# EAGLE board SenseBox-Eye_v1.2 (EAGLE 9.6.2)
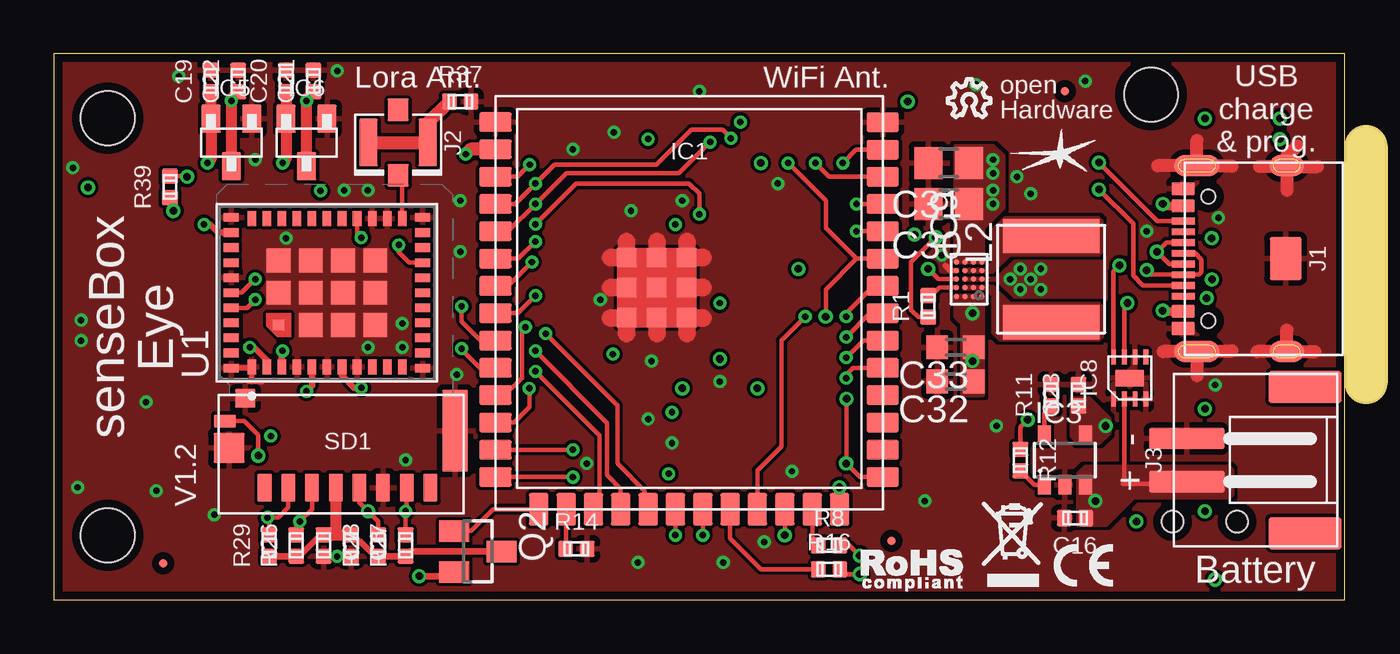
[diagram p0: board, top side]
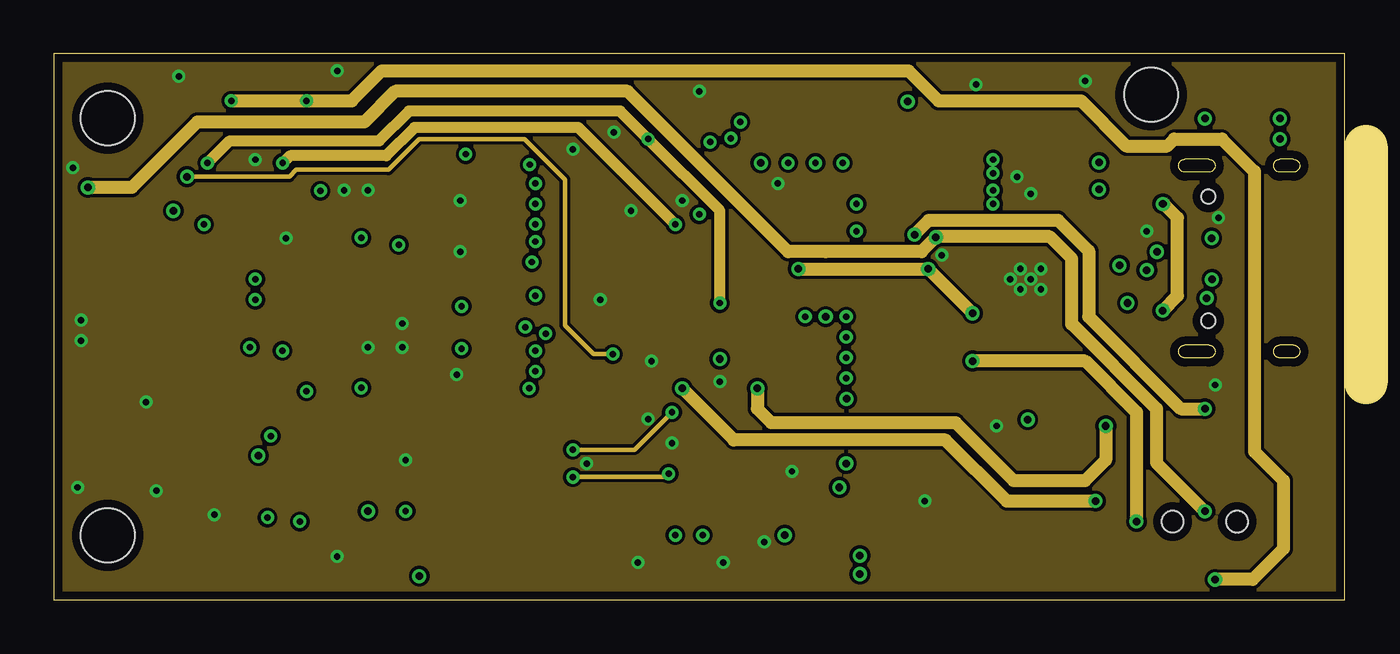
[diagram p1: board, inner layer Route2]
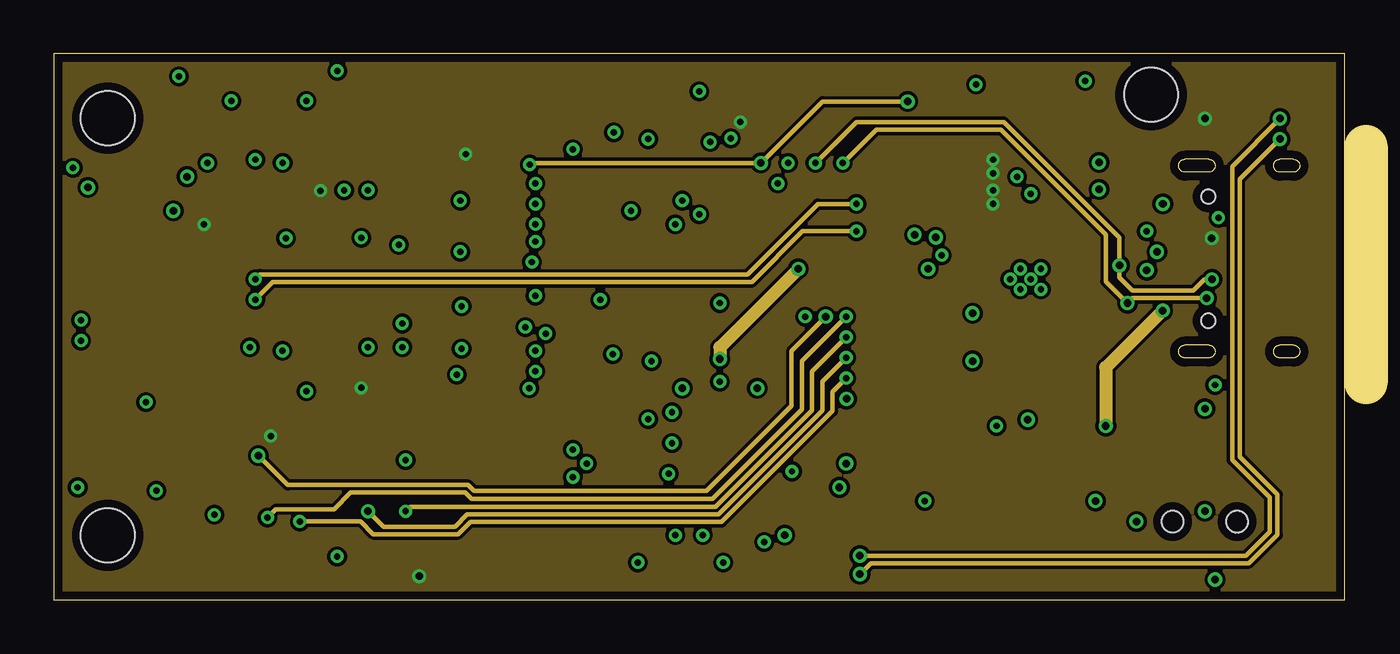
[diagram p2: board, inner layer Route15]
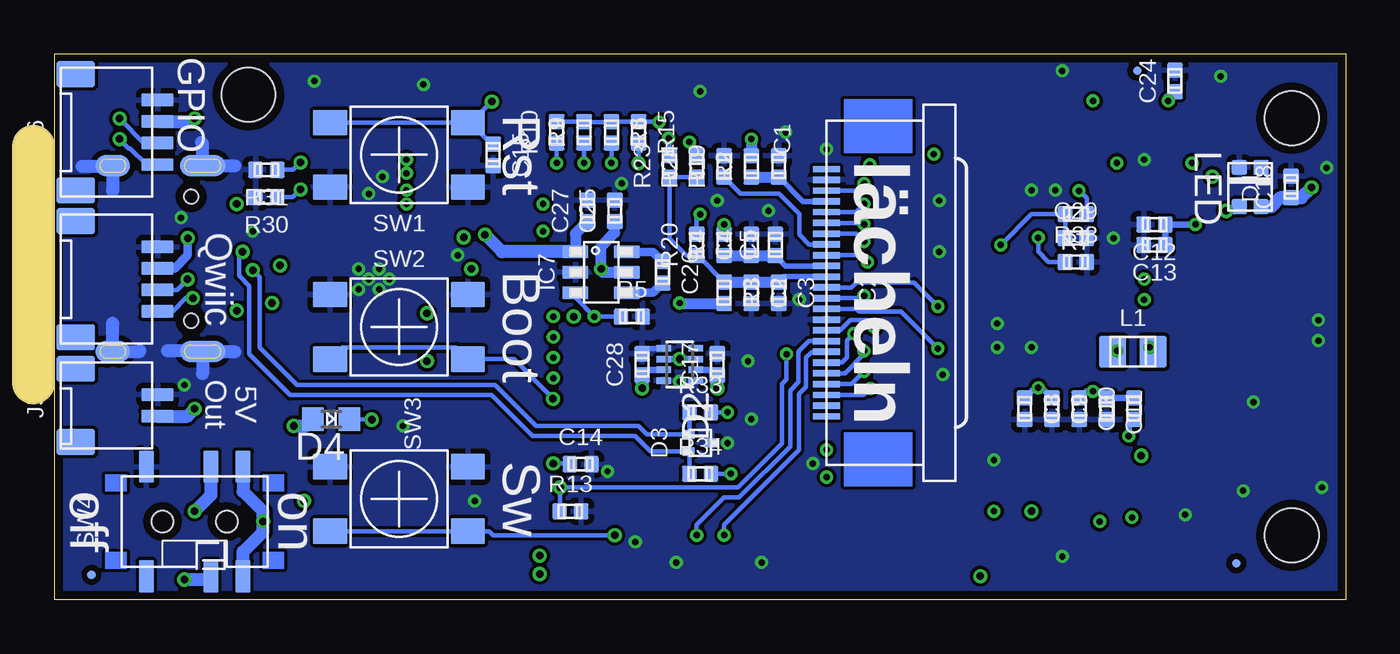
[diagram p3: board, bottom side, seen from below]

Size 60 x 25.4 mm. Coordinates in mm from the lower left corner, seen from the top.
Outline: 0,0 60,0 60,25.4 0,25.4 0,0
Copper layers (1+2*15+16): Top 0.035mm / dielectric 0.35mm / Route2 0.035mm / dielectric 0.76mm / Route15 0.035mm / dielectric 0.35mm / Bottom 0.035mm
Design rules "we-dru-4-layer": minimum track width 6mil, minimum drill 0.3mm, track to track 6mil, track to pad 6mil, pad to pad 8mil, via to via 8mil, smd to smd 4mil, copper to edge 0.4mm, drill to drill 0.4mm, minimum pad ring 6mil, minimum via ring 6mil, stop-mask expansion 0.1mm, vias tented up to drill 0.5mm, thermal gap 0.25mm
Holes 2.5 mm at 2.5,3 51,23.5 2.5,22.4
Milling: 1 lines

## Footprints (pad centres in the part's own frame; a part is rotated, then mirrored left to right if it is on the bottom)
C0402 = smd 0.75 x 0.7: 1 0,0.5; 2 0,-0.5
0805N = smd 1.3 x 1.5: 1 -0.95,0; 2 0.95,0
0603N = smd 1 x 1.1: 1 -0.85,0; 2 0.85,0
WS2812_2020 = smd 0.7 x 0.7: 1 -0.915,0.5; 2 -0.915,-0.5; 3 0.915,-0.5; 4 0.915,0.5
SOT-5X3 = smd 0.3 x 0.67: 1 -0.75,-0.74; 2 -0.25,-0.74; 3 0.25,-0.74; 4 0.75,-0.74; 5 0.75,0.74; 6 0.25,0.74; 7 -0.25,0.74; 8 -0.75,0.74
SOT723 = smd 0.6 x 0.4: 1 -0.55,0.4; 2 -0.55,-0.4; 3 0.55,0
0603N' = smd 1 x 1.1: A 0.85,0; C -0.85,0
ESP32-S3-WROOM-1U = smd 1.5 x 0.9: 1 -9,8.255; 2 -9,6.985; 3 -9,5.715; 4 -9,4.445; 5 -9,3.175; 6 -9,1.905; 7 -9,0.635; 8 -9,-0.635; 9 -9,-1.905; 10 -9,-3.175; 11 -9,-4.445; 12 -9,-5.715; 13 -9,-6.985; 14 -9,-8.255; 27 9,-8.255; 28 9,-6.985; 29 9,-5.715; 30 9,-4.445; 31 9,-3.175; 32 9,-1.905; 33 9,-0.635; 34 9,0.635; 35 9,1.905; 36 9,3.175; 37 9,4.445; 38 9,5.715; 39 9,6.97; 40 9,8.24 | smd 0.9 x 1.5: 15 -6.985,-9.745; 16 -5.715,-9.745; 17 -4.445,-9.745; 18 -3.175,-9.745; 19 -1.905,-9.745; 20 -0.635,-9.745; 21 0.635,-9.745; 22 1.905,-9.745; 23 3.175,-9.745; 24 4.445,-9.745; 25 5.73,-9.745; 26 7,-9.745 | smd 0.9 x 0.9: P$1 -1.5,0.555; P$2 -0.1,0.555; P$3 -0.1,-0.845; P$4 -1.5,-0.845; P$5 -2.9,-0.845; P$6 -2.9,0.555; P$7 -2.9,1.955; P$8 -1.5,1.955; P$9 -0.1,1.955
WE-CHIP_FPC24-0.5-CAM = smd 1.27 x 0.279: 1 0,5.75; 2 0,5.25; 3 0,4.75; 4 0,4.25; 5 0,3.75; 6 0,3.25; 7 0,2.75; 8 0,2.25; 9 0,1.75; 10 0,1.25; 11 0,0.75; 12 0,0.25; 13 0,-0.25; 14 0,-0.75; 15 0,-1.25; 16 0,-1.75; 17 0,-2.25; 18 0,-2.75; 19 0,-3.25; 20 0,-3.75; 21 0,-4.25; 22 0,-4.75; 23 0,-5.25; 24 0,-5.75
SOT23-5 = smd 0.6 x 0.9: 1 -0.95,-1.15; 2 0,-1.15; 3 0.95,-1.15; 4 0.95,1.15; 5 -0.95,1.15
SOT23 = smd 1.3 x 0.9: 1 -1.1,0.95; 2 -1.1,-0.95; 3 1.1,0
SOT23-6 = smd 1.2 x 0.6: 1 -1.2,0.95; 2 -1.2,0; 3 -1.2,-0.95; 4 1.2,-0.95; 5 1.2,0; 6 1.2,0.95
UDFN8_2020 = smd 0.7 x 0.28: 1 -0.975,0.75; 2 -0.975,0.25; 3 -0.975,-0.25; 4 -0.975,-0.75; 5 0.975,-0.75; 6 0.975,-0.25; 7 0.975,0.25; 8 0.975,0.75 | smd 0.8 x 1.35: TP 0,0
WLCSP-20-P1 = smd 0.265 x 0.265: A1 -0.8,-0.6; A2 -0.4,-0.6; A3 0,-0.6; A4 0.4,-0.6; A5 0.8,-0.6; B1 -0.8,-0.2; B2 -0.4,-0.2; B3 0,-0.2; B4 0.4,-0.2; B5 0.8,-0.2; C1 -0.8,0.2; C2 -0.4,0.2; C3 0,0.2; C4 0.4,0.2; C5 0.8,0.2; D1 -0.8,0.6; D2 -0.4,0.6; D3 0,0.6; D4 0.4,0.6; D5 0.8,0.6
USB-C-S = smd 1.1 x 0.3: A5 -1.155,-1.25; A6 -1.155,-0.25; A7 -1.155,0.25; A8 -1.155,1.25; B5 -1.155,1.75; B6 -1.155,0.75; B7 -1.155,-0.75; B8 -1.155,-1.75 | smd 1.05 x 0.6: GND -1.175,3.25; GND2 -1.175,-3.25; VBUS -1.175,2.45; VBUS2 -1.175,-2.45 | smd 2.1 x 1: S@1 -0.53,4.32; S@5 -0.53,-4.32 | smd 2.1 x 1 bottom: S@2 -0.53,4.32; S@6 -0.53,-4.32 | smd 1.6 x 1: S@3 3.65,4.32; S@7 3.65,-4.32 | smd 1.6 x 1 bottom: S@4 3.65,4.32; S@8 3.65,-4.32 | smd 1.5 x 2: S@9 3.6,0 | hole 0.65: 0,-2.89; 0,2.89
U.FL = smd 2.2 x 0.85: 1 0,1.375; 2 0,-1.375 | smd 1.05 x 1: FEED 1.525,0; NC -1.525,0
JST_S2B-PH-SM4-TB = smd 3.5 x 1: 1 1,1; 2 1,-1 | smd 3.4 x 1.5: SHLD1 -4.5,3.4; SHLD2 -4.5,-3.4
JST_SM04B-SRSS-TB = smd 1.5 x 0.6: 1 2.4,1.5; 2 2.4,0.5; 3 2.4,-0.5; 4 2.4,-1.5 | smd 1.8 x 1.2: SHLD1 -1.4,-2.7; SHLD2 -1.4,2.7
JST_SM02B-SRSS-TB = smd 1.5 x 0.6: 1 2.4,0.5; 2 2.4,-0.5 | smd 1.8 x 1.2: SHLD1 -1.4,-1.7; SHLD2 -1.4,1.7
C0805 = smd 1.5 x 1.25: 1 0,0.95; 2 0,-0.95
5040 = smd 1.6 x 4.5: 1 -2,0; 2 2,0
SOT23' = smd 1 x 1.4: 1 -0.95,-1.1; 2 0.95,-1.1; 3 0,1.1
SD_47309XXXX = smd 0.65 x 1.3: CS 2.75,4.3; DAT1 -3.85,4.3; DAT2 3.85,4.3; GND -1.65,4.3; MISO -2.75,4.3; MOSI 1.65,4.3; SCK -0.55,4.3; VCC 0.55,4.3 | smd 1.2 x 3.8: GND@1 -5,1.65 | smd 1.45 x 1.4: GND@2 5.5,2.45 | smd 1 x 0.6: SW1 5.7,1.2 | smd 0.95 x 0.85: SW2 4.75,0.15
TL3305 = smd 1.6 x 1.2: 1 -3.2,1.5; 2 -3.2,-1.5; 3 3.2,-1.5; 4 3.2,1.5
CUS22B = smd 0.7 x 1.5: 1 -2.25,2.55; 2 0.75,2.55; 3 2.25,2.55; 4 -2.25,-2.55; 5 0.75,-2.55; 6 2.25,-2.55 | hole 1: -1.5,0; 1.5,0
MODULE_LBAA0QB1SJ-296 = smd 0.7 x 0.4: 1 -3.45,3.5; 2 -3.45,2.8; 3 -3.45,2.1; 4 -3.45,1.4; 5 -3.45,0.7; 6 -3.45,0; 7 -3.45,-0.7; 8 -3.45,-1.4; 9 -3.45,-2.1; 10 -3.45,-2.8; 11 -3.45,-3.5; 23 3.45,-3.5; 24 3.45,-2.8; 25 3.45,-2.1; 26 3.45,-1.4; 27 3.45,-0.7; 28 3.45,0; 29 3.45,0.7; 30 3.45,1.4; 31 3.45,2.1; 32 3.45,2.8; 33 3.45,3.5 | smd 0.4 x 0.7: 12 -3.5,-4.45; 13 -2.8,-4.45; 14 -2.1,-4.45; 15 -1.4,-4.45; 16 -0.7,-4.45; 17 0,-4.45; 18 0.7,-4.45; 19 1.4,-4.45; 20 2.1,-4.45; 21 2.8,-4.45; 22 3.5,-4.45; 34 3.5,4.45; 35 2.8,4.45; 36 2.1,4.45; 37 1.4,4.45; 38 0.7,4.45; 39 0,4.45; 40 -0.7,4.45; 41 -1.4,4.45; 42 -2.1,4.45; 43 -2.8,4.45; 44 -3.5,4.45 | smd 0.5 x 0.5: 45 -1.5,2.25 | smd 1.1 x 1.1: 46 -1.5,0.75; 47 -1.5,-0.75; 48 -1.5,-2.25; 49 0,-2.25; 50 1.5,-2.25; 51 1.5,-0.75; 52 1.5,0.75; 53 1.5,2.25; 54 0,2.25; 55 0,0.75; 56 0,-0.75
PASSER_04MM = smd 0.4 x 0.4: X 0,0

## Placement (x,y rotation side)
C1  4,7uF  [C0402]  26.35,20.16 0 bottom
C2  4,7uF  [C0402]  27.62,14.29 180 bottom
C3  100nF  [C0402]  26.35,14.29 180 bottom
C4  4,7uF  [C0402]  27.62,16.51 0 bottom
C5  100nF  [C0402]  26.51,16.51 0 bottom
C6  22uF  [C0402]  13.81,2.54 180 top
C7  100nF  [C0402]  12.54,2.54 180 top
C8  10uF/6.3V  [C0402]  14.92,8.89 180 bottom
C9  100n  [C0402]  13.65,8.89 180 bottom
C10  10uF/6.3V  [C0402]  12.38,8.89 180 bottom
C11  100n  [C0402]  11.11,8.89 180 bottom
C12  10uF/6.3V  [C0402]  8.89,17.46 90 bottom
C13  100n  [C0402]  8.89,16.51 90 bottom
C14  100n  [C0402]  35.56,6.32 270 bottom
C15  100n  [C0402]  39.62,20.7 180 bottom
C16  4u7  [C0402]  47.47,3.81 90 top
C17  1u  [C0402]  29.21,10.95 0 bottom
C18  100n  [C0402]  2.54,19.21 0 bottom
C19  100nF  [C0402]  7.3,24.13 0 top
C20  100nF  [C0402]  10.79,24.13 0 top
C21  100nF  [C0402]  12.06,24.13 0 top
C22  100nF  [C0402]  8.57,24.13 0 top
C23  4u7  [C0402]  47.62,9.53 0 top
C24  4,7uF  [C0402]  7.94,24.13 0 bottom
C25  2u2  [C0402]  33.97,18.1 0 bottom
C26  2u2  [C0402]  31.75,15.24 180 bottom
C27  2u2  [C0402]  35.24,18.1 0 bottom
C28  1u  [C0402]  32.7,10.95 0 bottom
C29  100n  [C0402]  12.54,16.83 270 bottom
C30  22u  [0805N]  41.59,18.41 180 top
C31  22u  [0805N]  41.59,20.32 180 top
C32  4u7  [0603N]  41.91,10.16 180 top
C33  4u7  [0603N]  41.91,11.75 180 top
D1  WS2812B-2020  [WS2812_2020]  4.45,19.21 270 bottom
D2  LM66200DRLR  [SOT-5X3]  30.96,10.95 270 bottom
D3  D_ESD5V3U2U-03F  [SOT723]  30,7.3 0 bottom
D4  red  [0603N']  47.15,8.41 180 bottom
IC1  ESP32-S3-WROOM-1U-N16R8  [ESP32-S3-WROOM-1U]  29.53,13.97 0 top
IC2  WE-CHIP_ESP32-CAM  [WE-CHIP_FPC24-0.5-CAM]  24.13,14.29 0 bottom
IC3  MCP73831T-2ACI/OT  [SOT23-5]  46.99,6.51 0 top
IC5  AP2127N-2.8TRG1  [SOT23]  8.26,21.27 270 top
IC6  AP2127N-1.5TRG1  [SOT23]  11.75,21.27 270 top
IC7  REG710NA-5  [SOT23-6]  34.61,15.24 0 bottom
IC8  MAX17048  [UDFN8_2020]  50.01,10.32 90 top
IC9  RP602Z330C-E2-F  [WLCSP-20-P1]  42.55,14.92 90 top
J1  USB-C-S  [USB-C-S]  53.66,15.88 0 top
J2  U.FL  [U.FL]  16,21.27 270 top
J3  JST2-S2B-PH-SM4-TB  [JST_S2B-PH-SM4-TB]  53.66,6.51 180 top
J4  JST4-SM04B-SRSS-TB  [JST_SM04B-SRSS-TB]  57.63,14.92 0 bottom
J5  JST2-SM02B-SRRS-TB  [JST_SM02B-SRSS-TB]  57.63,9.05 0 bottom
J6  JST4-SM04B-SRSS-TB  [JST_SM04B-SRSS-TB]  57.63,21.75 0 bottom
L1  MLZ2012N150LT000  [C0805]  9.89,11.54 270 bottom
L2  1u  [5040]  46.35,14.92 270 top
L3  BLM15AG102SN1D  [C0402]  9.84,8.89 0 bottom
LOGO2  LOGO_CE-2  [CE_2MM]  47.85,1.61 0 top
LOGO3  LOGO_OSHW-2  [OSHW_2MM]  42.55,23.34 0 top
LOGO4  LOGO_ROHS-2  [ROHS_2MM]  39.89,1.38 0 top
LOGO5  LOGO_WEEE-4  [WEEE_4MM]  44.53,2.6 0 top
LOGO6  LOGO_SPARK-2  [SPARK_2MM]  46.78,20.72 180 top
Q2  PMV48XP  [SOT23']  19.7,2.26 270 top
R1  100k  [C0402]  40.64,13.65 0 top
R2  0  [C0402]  27.62,20.16 0 bottom
R3  0  [C0402]  28.89,14.29 180 bottom
R4  0  [C0402]  28.89,16.51 0 bottom
R5  10k  [C0402]  33.18,13.18 270 bottom
R6  10k  [C0402]  34.13,21.75 180 bottom
R7  10k  [C0402]  12.54,17.94 90 bottom
R8  33  [C0402]  36.04,2.54 270 top
R9  4k7  [C0402]  35.4,21.75 0 bottom
R10  4k7  [C0402]  36.67,21.75 0 bottom
R11  2k  [C0402]  46.35,9.53 0 top
R12  1k  [C0402]  44.93,6.51 180 top
R13  100k  [C0402]  36.04,4.13 270 bottom
R14  100k  [C0402]  24.29,2.38 270 top
R15  10k  [C0402]  32.86,21.75 180 bottom
R16  33  [C0402]  36.04,1.43 270 top
R19  10k  [C0402]  28.89,20.16 0 bottom
R20  10k  [C0402]  30.16,16.51 0 bottom
R23  4k7  [C0402]  31.43,20.16 0 bottom
R24  4k7  [C0402]  30.16,20.16 0 bottom
R26  10k  [C0402]  11.27,2.54 0 top
R27  10k  [C0402]  16.35,2.54 0 top
R28  10k  [C0402]  15.08,2.54 0 top
R29  10k  [C0402]  10,2.54 0 top
R30  5k1  [C0402]  50.16,18.73 90 bottom
R31  5k1  [C0402]  50.16,20 90 bottom
R33  33  [C0402]  30,8.73 270 bottom
R34  33  [C0402]  30,5.87 270 bottom
R37  0  [C0402]  18.89,23.18 270 top
R38  10k  [C0402]  12.54,15.72 270 bottom
R39  330  [C0402]  5.4,19.21 0 top
SD1  10067099-400LF  [SD_47309XXXX]  13.65,9.53 180 top
SW1  SW-TACTILE-TL3305  [TL3305]  44,20.7 180 bottom
SW2  SW-TACTILE-TL3305  [TL3305]  44,12.7 0 bottom
SW3  SW-TACTILE-TL3305  [TL3305]  44,4.7 0 bottom
SW4  SW-2UM-CUS22B  [CUS22B]  53.5,3.65 0 bottom
U1  LBAA0QB1SJ-686  [MODULE_LBAA0QB1SJ-296]  12.7,14.29 90 top
X1  PASSER-04  [PASSER_04MM]  38.93,2.75 0 top
X2  PASSER-04  [PASSER_04MM]  5.09,1.71 0 top
X3  PASSER-04  [PASSER_04MM]  46.99,23.65 0 top
X4  PASSER-04  [PASSER_04MM]  58.3,1.17 0 bottom
X5  PASSER-04  [PASSER_04MM]  9.68,24.61 0 bottom
X6  PASSER-04  [PASSER_04MM]  5.09,1.71 0 bottom

## Library data of the parts
C1-C29 L1 L3 R1-R16 R19 R20 R23 R24 R26-R31 R33 R34 R37-R39 = we-rcl
C30 C31 = BE_capacitor; BE#: 208; DIELECTRIC: X5R; VOLTAGE: 6V3
C32 C33 = BE_capacitor; BE#: 284; DIELECTRIC: X5R; VOLTAGE: 6V3
D1 = we-opto
D2 = BE_diode; BE#: 2291
D3 = we-rcl; DIGIKEY: ESD5V3U2U-03F H6327DKR-ND
D4 = BE_opto; BE#: 224
IC1 = we-chip
IC2 = SenseBox-Eye
IC3 = BE_dcdc; BE#: 2283
IC5-IC8 = we-power
IC9 = BE_dcdc; BE#: 2281
J1-J6 SD1 = we-con
L2 = BE_inductor; BE#: 2282; CURRENT: 4.9; INDUCTANCE: 1u
LOGO2-LOGO6 X1-X6 = we-symbol
Q2 = BE_transistor; BE#: 271; CURRENT: 3.5; VOLTAGE: 20
SW1-SW3 = we-switch
SW4 = we-switch; DIGIKEY: 563-1105-6-ND
U1 = LBAA0QB1SJ-296; MANUFACTURER: Murata; MAXIMUM_PACKAGE_HEIGHT: 1.6 mm; PARTREV: F; STANDARD: Manufacturer Recommendations

## Nets
+1V5: C20.2 IC6.2 R4.1
+2V8: C19.2 IC5.2 R2.1 R3.1
+3V3: C8.2 C9.2 C12.2 C13.2 C30.1 C31.1 IC1.2 IC9.A5 IC9.B5 IC9.C5 IC9.D5 J4.2 J6.2 L3.2 Q2.2 R6.2 R7.2 R9.1 R10.1 R15.2 U1.7 U1.35
+5V: C27.2 IC7.1 J5.2
ANT: J2.FEED U1.23
AVDD_2V8: C1.2 IC2.4 R2.2
BOLX: IC9.A4 IC9.B4 IC9.C4 L2.1
BOOT: C14.2 IC1.27 SW2.2 SW2.3
BULX: IC9.A2 IC9.B2 IC9.C2 L2.2
BUTTON: IC1.24 SW3.2 SW3.3
CAM_HREF: IC1.7 IC2.9
CAM_PCLK: IC1.21 IC2.17
CAM_PWDN: IC2.8 R19.2
CAM_RESET: IC2.6 R20.1
CAM_SCL: IC1.5 IC2.5 R24.1
CAM_SDA: IC1.4 IC2.3 R23.1
CAM_VSYNC: IC1.6 IC2.7
CAM_XMCLK: IC1.8 IC2.13
CAM_Y2: IC1.19 IC2.19
CAM_Y3: IC1.17 IC2.21
CAM_Y4: IC1.12 IC2.22
CAM_Y5: IC1.18 IC2.20
CAM_Y6: IC1.20 IC2.18
CAM_Y7: IC1.11 IC2.16
CAM_Y8: IC1.10 IC2.14
CAM_Y9: IC1.9 IC2.12
CC1: J1.A5 R30.2
CC2: J1.B5 R31.2
DOVDD_2V8: C2.2 C3.2 IC2.11 R3.2 R20.2 R23.2 R24.2
DVDD_1V5: C4.2 C5.2 IC2.10 R4.2
EN: C15.2 IC1.3 R15.1 SW1.2 SW1.3
EN_5V: IC1.23 IC7.3 R5.2
ENABLE_3V3: IC9.D2 R1.1
GND: C1.1 C2.1 C3.1 C4.1 C5.1 C6.1 C7.1 C8.1 C9.1 C10.1 C11.1 C12.1 C13.1 C14.1 C15.1 C16.1 C17.1 C18.1 C19.1 C20.1 C21.1 C22.1 C23.1 C24.1 C25.1 C27.1 C28.1 C29.1 C30.2 C31.2 C32.2 C33.2 D1.2 D2.1 D2.4 D2.5 D3.3 IC1.1 IC1.40 IC1.P$1 IC1.P$2 IC1.P$3 IC1.P$4 IC1.P$5 IC1.P$6 IC1.P$7 IC1.P$8 IC1.P$9 IC2.2 IC2.15 IC3.2 IC5.1 IC6.1 IC7.2 IC8.1 IC8.4 IC8.6 IC8.TP IC9.A3 IC9.B3 IC9.C3 IC9.D4 J1.GND J1.GND2 J1.S@1 J1.S@2 J1.S@3 J1.S@4 J1.S@5 J1.S@6 J1.S@7 J1.S@8 J1.S@9 J3.2 J4.1 J5.1 J6.1 R5.1 R11.1 R13.1 R14.1 R19.1 R30.1 R31.1 R37.1 R38.1 SD1.GND SD1.GND@1 SD1.GND@2 SD1.SW2 SW1.1 SW1.4 SW2.1 SW2.4 SW3.1 SW3.4 SW4.1 U1.1 U1.4 U1.6 U1.8 U1.12 U1.22 U1.24 U1.25 U1.34 U1.38 U1.44 U1.45 U1.46 U1.47 U1.48 U1.49 U1.50 U1.51 U1.52 U1.53 U1.54 U1.55 U1.56
IO14: IC1.22 R16.2
IO19: IC1.13 R33.1
IO20: IC1.14 R34.1
IO46: IC1.16 R14.2
IO48: IC1.25 R8.2
LED_DIN: D1.3 R39.2
LED_LV: IC1.26 R13.2 R39.1
LORA-USB-DN: U1.37
LORA-USB-DP: U1.36
LORA_RESET: C29.2 R7.1 U1.19
LORA_RX: IC1.37 U1.39
LORA_TX: IC1.36 U1.40
MCU-BOOT0: R38.2 U1.26
N$1: L1.2 U1.3
N$2: L1.1 U1.2
N$3: J2.1 J2.2 R37.2
N$4: J6.4 R16.1
N$5: C26.2 IC7.6
N$6: C26.1 IC7.4
N$8: D4.C R12.2
N$9: IC3.1 R12.1
N$10: IC3.5 R11.2
N$13: J6.3 R8.1
SCL: IC1.39 IC8.7 J4.4 R10.2
SD_!CS: IC1.34 R29.1 SD1.CS
SD_CLK: IC1.32 R28.1 SD1.SCK
SD_CMD: IC1.31 R26.1 SD1.MOSI
SD_DAT: IC1.33 R27.1 SD1.MISO
SD_ENABLE: IC1.15 Q2.1
SD_SW: IC1.35 R6.1 SD1.SW1
SDA: IC1.38 IC8.8 J4.3 R9.2
SDIO_3V3: C6.2 C7.2 Q2.3 R26.2 R27.2 R28.2 R29.2 SD1.VCC
USB-DN: D3.1 J1.A7 J1.B7 R33.2
USB-DP: D3.2 J1.A6 J1.B6 R34.2
V_LED: C18.2 D1.4 R1.2 SW4.2
VBAT: C16.2 C17.2 D2.6 IC3.3 IC8.2 IC8.3 J3.1
VDD_RF: C10.2 C11.2 L3.1 U1.5
VIN: C21.2 C22.2 C24.2 IC5.3 IC6.3 SW4.5
VSWITCHED: C25.2 C32.1 C33.1 D2.2 D2.7 IC7.5 IC9.A1 IC9.B1 IC9.C1 IC9.D1 IC9.D3 SW4.3 SW4.6
VUSB: C23.2 C28.2 D2.3 D4.A IC3.4 J1.VBUS J1.VBUS2

## Tracks (layer width: path | path; a pad name or v marks a point on that pad's centre or on a via)
+1V5  (via drill 0.3)
  Top 0.508: C20.2 IC6.2 10.8,20.48 v10.64,20.32
  Route2 0.508: v10.64,20.32 10.98,20.66 15.46,20.66 16.76,21.97 24.38,21.97 v28.89,17.46
  Bottom 0.508: v28.89,17.46 R4.1
+2V8  (via drill 0.3)
  Top 0.508: C19.2 IC5.2 7.3,20.48 v7.14,20.32
  Route2 0.508: v7.14,20.32 8.18,21.36 15.13,21.36 16.51,22.73 26.32,22.73 v27.62,21.43 30.96,18.1 v30.96,13.81
  Bottom 0.508: v27.62,21.43 R2.1 | v30.96,13.81 30.93,13.79 R3.1
+3V3  (via drill 0.3, 0.35)
  Top 0.2: 42.54,20.58 C31.1
  Top 0.305: U1.7 13.4,10.44 13.97,9.87 v14.29,9.87 | U1.35 7.64,17.09 7.26,17.46 v6.99,17.46 | Q2.2 18.41,1.11 v16.99,1.11
  Top 0.61: IC1.2 19.37,20.95 v19.14,20.73
  Bottom 0.2: R10.1 R9.1 35.38,22.23 34.16,22.23 R6.2 R15.2 31.93,22.25 v31.91,22.23 | R7.2 12.04,18.68 v12.4,19.03
  Bottom 0.305: C8.2 14.45,9.87 v14.29,9.87 14.13,9.87 C9.2 | L3.2 10.08,8.15 v10.08,7.62 | C13.2 C12.2 v6.99,17.46
  Bottom 0.406: J4.2 54.43,15.42 53.82,16.03 v53.82,16.83
  Bottom 0.61: J6.2 53.63,22.25 v53.5,22.38
  other vias: 43.66,20.48 43.66,19.84 43.66,19.05 43.66,18.41
  pour Route15 (rank 6): -3.17,29.53 -3.17,-5.4 59.69,-5.4 59.69,29.53
  pour Top (no thermals): 41.91,21.11 41.91,15.72 43.18,15.72 43.18,17.3 44.13,18.26 44.13,20.64 43.66,21.11
+5V  (via drill 0.35)
  Route2 0.61: v40.01,16.99 40.67,17.66 46.67,17.66 48.1,16.23 48.1,13.18 52.39,8.89 v53.5,8.89
  Bottom 0.508: IC7.1 35.81,17.03 C27.2
  Bottom 0.61: IC7.1 39.21,16.19 v40.01,16.99 | J5.2 53.84,8.55 v53.5,8.89
ANT
  Top 0.2: U1.23 16.2,19.55 J2.FEED
AVDD_2V8
  Bottom 0.254: IC2.4 25.23,18.54 C1.2
  Bottom 0.508: R2.2 C1.2
BOLX
  pour Top (rank 2, no thermals): 42.23,15.4 42.23,15.24 43.66,15.24 44.45,16.03 48.58,16.03 48.74,16.19 48.74,17.62 48.58,17.78 44.13,17.78 43.66,17.3 43.66,15.72 43.34,15.4
BOOT  (via drill 0.35)
  Top 0.2: IC1.27 37.47,5.71 v36.83,6.35 36.84,6.36 v36.84,9.35
  Bottom 0.2: C14.2 36.09,6.35 v36.83,6.35 | v36.84,9.35 36.84,9.38 38.66,11.2 SW2.3 41.35,11.75 46.65,11.75 SW2.2
BULX
  pour Top (rank 2, no thermals): 42.23,14.61 43.66,14.61 44.45,13.81 48.58,13.81 48.74,13.65 48.74,12.22 48.58,12.06 43.97,12.06 43.66,12.38 43.66,14.13 43.34,14.45 42.23,14.45
BUTTON  (via drill 0.35)
  Top 0.2: IC1.24 v33.97,3.02
  Bottom 0.2: SW3.2 SW3.3 39.82,3.2 39.64,3.02 v33.97,3.02
CAM_HREF  (via drill 0.3)
  Top 0.2: IC1.7 21.11,14.61 v22.23,15.72
  Bottom 0.2: v22.23,15.72 22.55,16.04 IC2.9
CAM_PCLK  (via drill 0.3)
  Top 0.2: v30.16,3.02 IC1.21
  Bottom 0.2: IC2.17 24.95,12.04 25.43,11.55 25.43,10.13 25.82,9.75 25.82,7.14 28.2,4.76 28.89,4.76 30.16,3.49 v30.16,3.02
CAM_PWDN
  Bottom 0.2: IC2.8 24.95,16.54 25.4,16.99 25.4,17.94 26.35,18.89 28.12,18.89 R19.2
CAM_RESET  (via drill 0.3)
  Top 0.2: v22.38,17.48 24.27,19.37 29.53,19.37 30,18.89 v30,17.94
  Bottom 0.2: IC2.6 22.45,17.54 v22.38,17.48 | v30,17.94 30.16,17.78 R20.1
CAM_SCL  (via drill 0.3)
  Top 0.2: IC1.5 21.11,17.14 v22.38,18.41 23.82,19.86 29.06,19.86 v30.5,21.3
  Bottom 0.2: v22.38,18.41 22.76,18.04 IC2.5 | R24.1 30.16,20.95 v30.5,21.3
CAM_SDA  (via drill 0.3)
  Top 0.2: IC1.4 21.43,18.41 v22.38,19.37 23.27,20.26 28.02,20.26 29.64,21.87 31.07,21.87 v31.47,21.47
  Bottom 0.2: v22.38,19.37 22.71,19.04 IC2.3 | R23.1 31.43,21.43 v31.47,21.47
CAM_VSYNC  (via drill 0.3)
  Top 0.2: IC1.6 21.59,15.88 v22.38,16.67
  Bottom 0.2: v22.38,16.67 22.75,17.04 IC2.7
CAM_XMCLK  (via drill 0.3)
  Top 0.2: IC1.8 21.57,13.34 v22.38,14.15
  Bottom 0.2: v22.38,14.15 22.49,14.04 IC2.13
CAM_Y2  (via drill 0.3)
  Top 0.2: v22.86,12.38 26.19,9.05 26.19,6.35 27.46,5.08 27.46,4.38 IC1.19
  Bottom 0.2: IC2.19 23.41,11.04 23.18,11.27 23.18,12.06 v22.86,12.38
CAM_Y3  (via drill 0.3)
  Top 0.2: IC1.17 25.36,4.5 25.36,7.66 v22.38,10.64
  Bottom 0.2: v22.38,10.64 22.98,10.04 IC2.21
CAM_Y4  (via drill 0.3)
  Top 0.2: v22.1,9.84 22.11,9.83 22.11,8.97 21.4,8.26 IC1.12
  Bottom 0.2: IC2.22 22.41,9.54 v22.1,9.84
CAM_Y5  (via drill 0.3)
  Top 0.2: IC1.18 26.35,5.18 25.72,5.81 25.72,8.25 v22.38,11.58 v22.38,11.59
  Bottom 0.2: IC2.20 23.28,10.54 22.38,11.43 v22.38,11.59
CAM_Y6  (via drill 0.3)
  Top 0.2: v28.89,3.02 IC1.20
  Bottom 0.2: IC2.18 24.82,11.54 25.08,11.27 25.08,9.91 25.41,9.58 25.41,6.97 28.89,3.49 v28.89,3.02
CAM_Y7  (via drill 0.3)
  Top 0.2: v21.92,12.69 21.76,12.53 21.76,10.33 20.95,9.53 IC1.11
  Bottom 0.2: IC2.16 23.5,12.54 23.02,13.02 22.24,13.02 v21.92,12.69
CAM_Y8  (via drill 0.3)
  Top 0.2: v18.95,11.69 18.95,11.66 19.82,10.79 IC1.10
  Bottom 0.2: IC2.14 22.74,13.54 22.61,13.41 20.68,13.41 v18.95,11.69
CAM_Y9  (via drill 0.3)
  Top 0.2: IC1.9 19.84,12.06 18.95,12.95 v18.95,13.65
  Bottom 0.2: v18.95,13.65 20.07,14.77 22.73,14.77 22.96,14.54 IC2.12
CC1  (via drill 0.35)
  Top 0.2: J1.A5 50.62,14.62 50.16,15.08 50.16,17.51 v48.58,19.09
  Bottom 0.2: R30.2 48.94,18.73 v48.58,19.09
CC2  (via drill 0.35)
  Top 0.2: v48.58,20.34 51.3,17.62 J1.B5
  Bottom 0.2: R31.2 48.92,20 v48.58,20.34
DOVDD_2V8
  Bottom 0.2: R3.2 30.11,16.01 R20.2 30.64,16.01 31.43,16.8 R23.2 R24.2
  Bottom 0.254: IC2.11 26.1,15.04 C3.2
  Bottom 0.508: C3.2 C2.2 R3.2
DVDD_1V5
  Bottom 0.254: IC2.10 26.04,15.54 C5.2
  Bottom 0.508: C5.2 C4.2 R4.2
EN  (via drill 0.3, 0.35)
  Top 0.2: v22.12,20.25 21.56,19.68 IC1.3
  Route15 0.2: v22.12,20.25 22.19,20.32 v32.86,20.32 v32.87,20.32 35.73,23.18 v39.69,23.18
  Bottom 0.2: SW1.2 40.69,22.2 39.69,21.2 C15.2 | SW1.3 SW1.2 | R15.1 v32.86,20.32 | v39.69,23.18 40.66,22.2 SW1.2
EN_5V  (via drill 0.3)
  Top 0.2: v34.92,13.18 33.81,12.06 33.81,7.14 32.7,6.03 IC1.23
  Bottom 0.2: R5.2 v34.92,13.18 35.81,14.06 IC7.3
ENABLE_3V3
  Top 0.2: IC9.D2 41.17,14.52 40.8,14.15 R1.1
GND  (via drill 0.3)
  Top 0.2: IC1.P$1 IC1.P$4
  Top 0.254: U1.44 9.15,10.79 U1.1 9.2,10.31 9.05,10.16 9.68,10.16 | IC9.D4 41.67,15.32 41.43,15.56
  Top 0.61: J1.S@4 57.31,20.64 57.78,21.11 | J1.S@4 57.31,19.05 | J1.S@4 57.27,20.16 56.04,20.16 | J1.S@4 57.34,20.16 58.74,20.16 | J1.S@1 53.13,21.38 | J1.S@1 54.73,20.2 54.77,20.16 | J1.S@1 51.31,20.2 | J1.S@5 53.13,10.42 | J1.S@5 53.16,11.59 54.77,11.59 | J1.S@5 51.56,11.55 | J1.S@7 55.91,11.55 | J1.S@7 57.31,12.54 | J1.S@7 58.61,11.55
  Top 0.813: 25.88,15.93 IC1.P$7 26.63,16.67 | IC1.P$8 28.03,16.67 | 29.43,16.67 IC1.P$9 30.16,15.93 | IC1.P$2 30.16,14.53 | 30.16,13.12 IC1.P$3 29.43,12.38 | IC1.P$4 28.03,12.38 | 26.63,12.38 IC1.P$5 25.88,13.12 | IC1.P$6 25.88,14.53
  Bottom 0.254: D2.1 32.45,11.7 C28.1
  Bottom 0.61: J1.S@5 53.13,10.53 | J1.S@5 51.63,11.55 | J1.S@5 53.16,11.59 54.77,11.59 | 56.04,11.59 56.07,11.55 J1.S@7 57.31,12.86 | 57.31,19.05 J1.S@4 57.34,20.16 58.74,20.16 | 53.18,21.27 53.13,21.22 J1.S@1 51.63,20.2
  other vias: 47.94,24.13 44.45,14.92 44.93,15.4 44.93,14.45 45.88,15.4 45.4,14.92 45.88,14.45 28.73,7.3 34.31,5.98 33.02,2.7 24.77,6.35 16.35,6.51 27.15,1.75 16.19,12.86 16.19,11.75 14.61,11.75 14.61,19.05 13.49,19.05 9.37,20.48 13.18,24.61 33.66,19.37 26.83,18.1 44.77,19.68 42.86,23.97 45.4,18.89 18.89,18.57 18.89,16.19 18.73,10.48 10.79,16.83 1.27,13.02 1.27,12.06 4.29,9.21 4.76,5.08 1.11,5.24 13.17,2.03 7.46,3.97 30.96,10.16 25.4,13.97 29.21,18.57 0.89,20.1 5.81,24.35 41.27,16.03 31.11,1.75 40.48,4.6 43.81,8.1 27.78,11.11 27.62,8.41 30,23.65 26.04,21.75 24.13,20.95 50.8,17.14 54.13,17.78 53.98,10
  pour Bottom (rank 6): -3.49,29.84 -3.49,-5.71 59.69,-5.71 59.69,29.84
  pour Route2 (rank 6): -2.86,29.21 -2.86,-5.08 59.69,-5.08 59.69,29.21
  pour Top (isolate 0.05, rank 6): -2.54,28.89 -2.54,-4.76 59.69,-4.76 59.69,28.89
  pour Top (rank 5): 42.23,15.08 42.23,14.76 43.81,14.76 44.61,13.97 48.58,13.97 48.74,14.13 48.74,15.72 48.58,15.88 44.61,15.88 43.81,15.08
  pour Top (no thermals): 25.08,17.46 30.96,17.46 30.96,11.75 25.08,11.75
  pour Top (no thermals): 8.89,17.14 16.51,17.14 16.51,11.43 8.89,11.43
IO14
  Top 0.2: R16.2 32.86,1.43 31.43,2.86 IC1.22
IO19  (via drill 0.3)
  Top 0.2: v24.13,6.99 IC1.13
  Route2 0.2: v28.73,8.73 26.99,6.99 v24.13,6.99
  Bottom 0.2: R33.1 v28.73,8.73
IO20  (via drill 0.3)
  Top 0.2: v24.13,5.71 IC1.14
  Route2 0.2: v28.57,5.87 28.42,5.71 v24.13,5.71
  Bottom 0.2: R34.1 29.21,5.87 29.2,5.86 29.19,5.87 v28.57,5.87
IO46
  Top 0.2: R14.2 23.81,2.4 IC1.16
IO48
  Top 0.2: IC1.25 35.26,2.82 R8.2
LED_DIN  (via drill 0.35)
  Top 0.2: v5.56,18.1 5.4,18.26 R39.2
  Bottom 0.2: D1.3 5.36,18.29 v5.56,18.1
LED_LV  (via drill 0.3, 0.35)
  Top 0.2: IC1.26 36.53,5.22 v36.51,5.24 | R39.1 6.17,19.71 v6.19,19.68
  Route2 0.2: v25.99,11.43 25.09,11.43 23.75,12.77 23.75,19.55 21.88,21.43 16.99,21.43 15.56,20 11.27,20 10.95,19.68 v6.19,19.68
  Bottom 0.2: v25.99,11.43 25.99,10.26 26.19,10.05 26.19,7.29 28.25,5.24 v36.51,5.24 36.51,4.15 R13.2
LORA_RESET  (via drill 0.3)
  Top 0.2: U1.19 16.52,15.69 16.03,16.17 v16.03,16.51
  Bottom 0.2: C29.2 R7.1 14.61,17.94 v16.03,16.51
LORA_RX  (via drill 0.3)
  Top 0.2: v9.37,14.92 8.73,14.29 U1.39 | v37.31,18.41 IC1.37
  Route15 0.2: v37.31,18.41 35.52,18.41 32.24,15.14 9.58,15.14 v9.37,14.92
LORA_TX  (via drill 0.3)
  Top 0.2: U1.40 8.98,13.59 v9.37,13.97 | v37.31,17.14 IC1.36
  Route15 0.2: v9.37,13.97 10.18,14.78 32.44,14.78 34.8,17.14 v37.31,17.14
MCU-BOOT0  (via drill 0.3)
  Top 0.2: U1.26 14.1,17.03 v14.29,16.84
  Bottom 0.2: v14.29,16.84 14.29,16.19 13.81,15.72 R38.2
N$1  (via drill 0.3)
  Top 0.305: v10.63,11.59 10.6,11.55 U1.3
  Bottom 0.2: L1.2 10.8,11.59 v10.63,11.59
N$2  (via drill 0.3)
  Top 0.305: v9.11,11.75 9.32,11.75 9.9,11.17 U1.2
  Bottom 0.305: v9.11,11.75 8.94,11.59 L1.1
N$3
  Top 0.61: R37.2 17.38,22.16 J2.1 J2.2
N$4  (via drill 0.35)
  Top 0.2: R16.1 36.76,1.21 v37.47,1.21
  Route15 0.2: v37.47,1.21 37.97,1.71 55.55,1.71 56.87,3.03 56.87,4.91 55.12,6.66 55.12,19.56 v56.99,21.43
  Bottom 0.2: v56.99,21.43 56.55,21 56.48,21 55.74,20.25 J6.4
N$5
  Bottom 0.406: IC7.6 32.2,16.19 C26.2
N$6
  Bottom 0.406: IC7.4 32.2,14.29 C26.1
N$8  (via drill 0.35)
  Top 0.2: R12.2 44.93,8.04 v45.27,8.39
  Bottom 0.2: v45.27,8.39 46.27,8.39 D4.C
N$9
  Top 0.2: IC3.1 45.58,5.36 R12.1
N$10
  Top 0.2: IC3.5 46.04,8.71 R11.2
N$13  (via drill 0.35)
  Top 0.2: R8.1 36.99,2.54 v37.47,2.06
  Route15 0.2: v37.47,2.06 55.4,2.06 56.52,3.17 56.52,4.76 54.77,6.51 54.77,20.16 v56.99,22.38
  Bottom 0.2: J6.3 55.86,21.25 v56.99,22.38
SCL  (via drill 0.3, 0.35)
  Top 0.2: v36.67,20.32 37.29,20.94 IC1.39 | IC8.7 49.76,13.66 v49.9,13.81
  Route15 0.2: v36.67,20.32 38.22,21.87 44.01,21.87 48.9,16.99 48.9,14.82 v49.9,13.81 50.13,14.04 v53.58,14.04
  Bottom 0.2: R10.2 v36.67,20.32 | J4.4 54.52,13.42 53.91,14.04 v53.58,14.04
SD_!CS  (via drill 0.3)
  Top 0.2: R29.1 10,3.78 v9.94,3.84 10.45,3.84 10.9,4.3 SD1.CS | v36.83,13.18 36.83,13.34 38.1,14.61 IC1.34
  Route15 0.2: v9.94,3.84 10.32,4.22 13.02,4.22 13.8,5 19.12,5 19.42,4.7 30.61,4.7 34.77,8.86 34.77,11.11 v36.83,13.18
SD_CLK  (via drill 0.3, 0.35)
  Top 0.2: R28.1 15.08,3.65 v14.61,4.13 14.2,4.53 SD1.SCK | IC1.32 37.62,12.06 v36.83,11.27
  Route15 0.2: v14.61,4.13 15.33,3.41 18.64,3.41 19.22,3.98 30.9,3.98 35.72,8.8 35.72,10.16 v36.83,11.27
SD_CMD  (via drill 0.3)
  Top 0.2: R26.1 11.27,3.49 v11.43,3.65 12,4.22 SD1.MOSI | IC1.31 37.15,10.79 36.83,10.48 v36.83,10.32
  Route15 0.2: v11.43,3.65 14.26,3.65 14.85,3.06 18.79,3.06 19.36,3.63 31.05,3.63 36.2,8.78 36.2,9.68 v36.83,10.32
SD_DAT  (via drill 0.3)
  Top 0.2: R27.1 v16.35,4.13 16.4,4.18 SD1.MISO | v36.83,12.22 37.94,13.34 IC1.33
  Route15 0.2: v36.83,12.22 35.24,10.64 35.24,8.83 30.75,4.34 16.56,4.34 v16.35,4.13
SD_ENABLE
  Top 0.2: Q2.1 19.4,3.21 20.42,4.22 IC1.15
SD_SW  (via drill 0.3, 0.35)
  Top 0.2: v9.51,6.72 9.51,7.67 8.85,8.32 SD1.SW1 | v35.88,13.18 35.88,14.45 37.31,15.88 | IC1.35 37.31,15.88 | 37.31,15.88 35.88,17.3 35.88,18.58 v34.14,20.32 v34.13,20.32
  Route15 0.2: v35.88,13.18 34.29,11.59 34.29,9.03 30.34,5.08 19.54,5.08 19.27,5.35 10.87,5.35 v9.51,6.72
  Bottom 0.2: v34.13,20.32 R6.1
SDA  (via drill 0.3, 0.35)
  Top 0.2: v35.4,20.32 36.04,19.68 IC1.38 | IC8.8 49.26,15.28 v49.53,15.56
  Route15 0.2: v35.4,20.32 37.31,22.23 44.16,22.23 49.53,16.85 v49.53,15.56 49.53,15 50.14,14.39 50.46,14.39 52.97,14.39 53.49,14.91 v53.83,14.91
  Bottom 0.2: R9.2 v35.4,20.32 | J4.3 54.32,14.42 v53.83,14.91
SDIO_3V3
  Top 0.305: R29.2 R26.2 11.41,2.04 12.41,3.04 C7.2 | C6.2 14.16,2.69 14.27,2.69 14.93,2.04 R28.2 R27.2 16.57,2.26 Q2.3
  Top 0.508: C7.2 13.18,3.04 | 13.18,3.04 C6.2 | SD1.VCC 13.1,3.11 13.18,3.04
USB-DN  (via drill 0.35)
  Top 0.2: J1.A7 53.05,16.12 53.34,15.84 53.34,15.24 53.23,15.12 J1.B7 51.01,15.12 v50.8,15.34
  Bottom 0.2: R33.2 30.5,7.75 D3.1 32.47,7.7 32.86,8.1 37.62,8.1 39.53,10 48.74,10 50.48,11.75 50.48,15.02 v50.8,15.34
USB-DP  (via drill 0.35)
  Top 0.2: J1.B6 51.71,16.62 v51.28,16.19 51.84,15.62 J1.A6
  Bottom 0.2: R34.2 30.5,6.85 D3.2 32.3,6.9 33.02,7.62 37.78,7.62 39.69,9.53 49.05,9.53 50.96,11.43 50.96,14.61 51.44,15.08 51.44,16.03 v51.28,16.19
V_LED  (via drill 0.35)
  Top 0.2: R1.2 40.19,13.15 39.85,13.49 39.85,15.72 v40.99,16.87
  Route2 0.61: v53.5,4.13 51.24,6.38 51.24,8.89 47.31,12.82 47.31,15.88 46.29,16.89 41.02,16.89 v40.99,16.87 40.33,16.2 35.89,16.2 35.88,16.19 34.13,16.19 26.67,23.65 15.88,23.65 14.45,22.23 6.67,22.23 3.63,19.18 v1.59,19.18
  Bottom 0.61: v1.59,19.18 2.06,18.71 C18.2 3.05,18.71 3.47,18.29 D1.4 | SW4.2 52.75,4.88 v53.5,4.13
VBAT  (via drill 0.35)
  Top 0.2: J3.1 52.55,5.4 49.69,5.4 49.76,5.46 IC8.2 IC8.3
  Route2 0.61: v48.42,4.6 44.29,4.6 41.45,7.45 31.61,7.45 v29.21,9.84
  Bottom 0.305: D2.6 29.46,10.7 C17.2
  Bottom 0.61: v29.21,9.84 C17.2
  pour Top (no thermals): 47.62,5.87 47.62,3.49 48.9,3.49 50.16,4.76 54.61,4.76 54.77,4.92 54.77,6.03 54.61,6.19 47.94,6.19
VDD_RF  (via drill 0.3)
  Top 0.305: U1.5 12,9.96 v11.75,9.71
  Bottom 0.305: L3.1 C11.2 11.43,9.71 v11.75,9.71 12.06,9.71 C10.2
VIN  (via drill 0.3, 0.35)
  Top 0.508: C22.2 8.26,23.31 v8.26,23.21 IC5.3 | IC6.3 v11.75,23.21 11.75,23.31 C21.2
  Route2 0.61: v8.26,23.21 v11.75,23.21 13.85,23.21 15.24,24.61 39.73,24.61 41.12,23.21 47.75,23.21 49.85,21.11 51.75,21.11 52.07,21.43 54.29,21.43 55.8,19.93 55.8,6.91 57.15,5.56 57.15,2.38 55.72,0.95 v53.98,0.95
  Bottom 0.508: C24.2 8.26,23.31 v8.26,23.21
  Bottom 0.61: v53.98,0.95 52.9,0.95 SW4.5
VSWITCHED  (via drill 0.35)
  Top 0.2: IC9.D3 41.12,14.92 v40.64,15.4
  Route2 0.61: v50.32,3.65 50.32,8.73 47.94,11.11 v42.7,11.11 | v34.61,15.4 v40.64,15.4 v42.7,13.34
  Route15 0.61: v30.96,11.21 30.96,11.75 v34.61,15.4
  Bottom 0.254: 30.85,11.2 30.96,11.31 31.06,11.2
  Bottom 0.305: D2.7 30.85,11.2 | D2.2 31.06,11.2
  Bottom 0.406: v30.96,11.21 30.96,11.31
  Bottom 0.508: IC7.5 34.52,15.24 34.61,15.33 v34.61,15.4 34.61,16.45 33.97,17.08 C25.2
  Bottom 0.61: SW4.3 51.25,5.05 50.32,4.13 v50.32,3.65 50.32,3.17 51.25,2.25 SW4.6
  pour Top (no thermals): 41.91,14.13 43.18,14.13 43.18,9.53 42.23,9.53 42.23,12.86 41.91,13.18
VUSB  (via drill 0.35)
  Top 0.406: J1.VBUS2 51.57,13.43 v51.54,13.46 | v51.55,18.41 51.64,18.32 J1.VBUS
  Route2 0.61: v32.7,9.84 32.7,8.89 33.34,8.26 41.91,8.26 44.61,5.56 47.94,5.56 48.9,6.51 v48.9,8.1 | v51.54,13.46 52.23,14.15 52.23,17.78 51.59,18.41 v51.55,18.41
  Route15 0.61: v51.54,13.46 48.9,10.81 v48.9,8.1
  Bottom 0.305: D2.3 32.45,10.7 C28.2
  Bottom 0.61: C28.2 v32.7,9.84 | v48.9,8.1 48.32,8.1 D4.A
  pour Top (no thermals): 47.31,9.37 47.31,7.62 47.62,7.3 48.58,7.3 49.05,7.78 49.05,8.41 48.1,9.37

## Text on the board
tPlace: Lora Ant. | WiFi Ant. | USB / charge / & prog. | open / Hardware | senseBox / Eye | V1.2 | - | + | Battery
bPlace: GPIO | Rst | LED | Qwiic | lächeln | Boot | 5V / Out | Sw | on | off